# Altium PCB PCB07.PcbDoc
Units mm, origin at the board's own origin, x right, y up, seen from the top; angles counter-clockwise.
Board outline 100 x 100 mm, 2 copper layers (Top Layer, Bottom Layer), stack 1.569 mm thick; 12 components, 2 nets, 12 pads, 112 vias.
Unrouted connection lines stored in the file: 2.
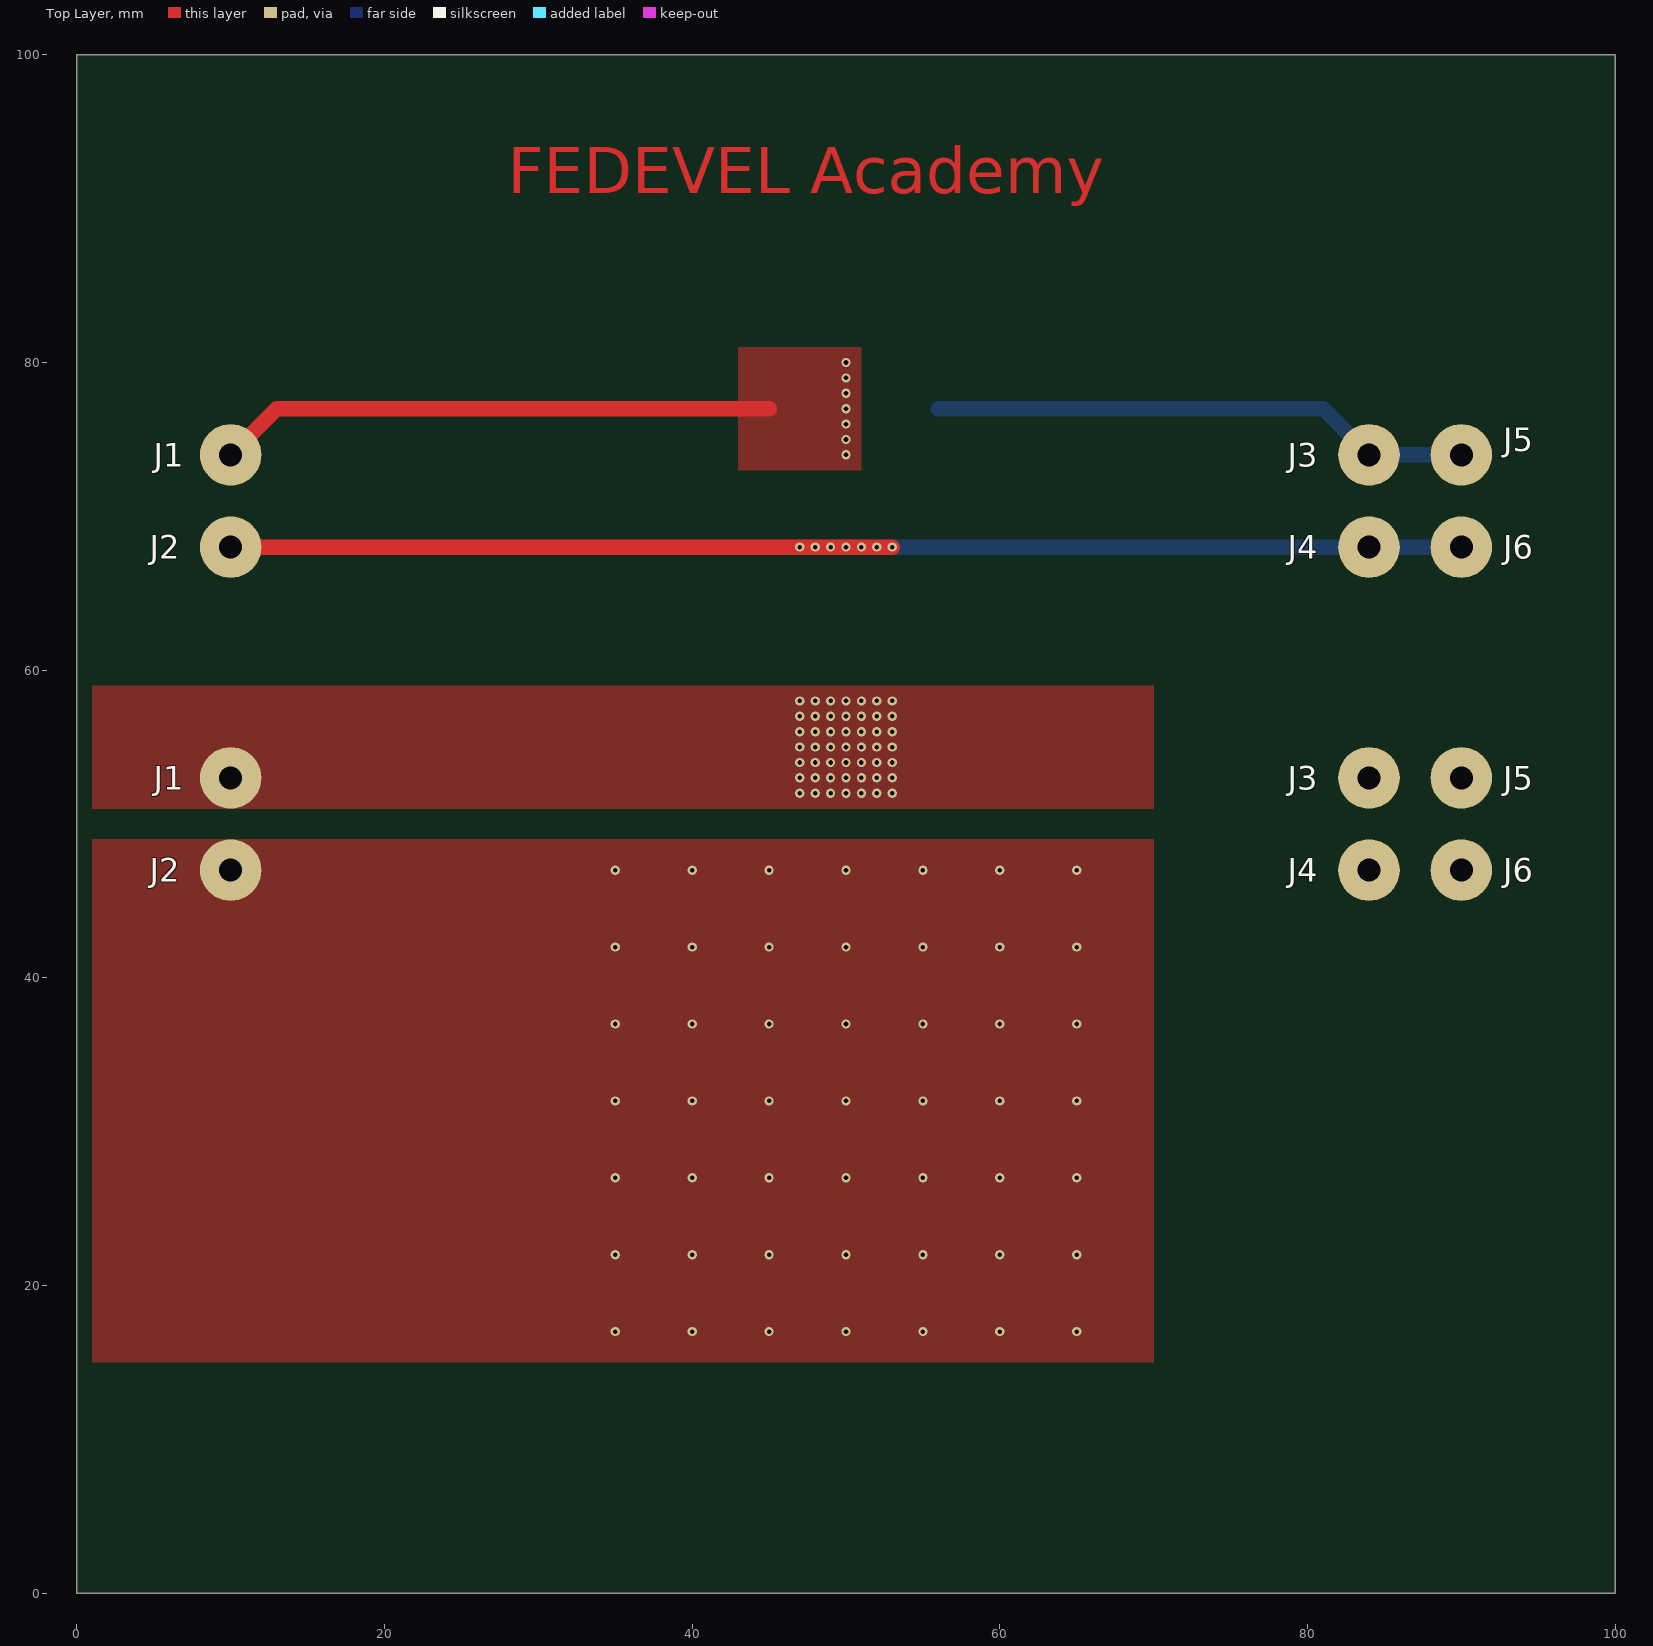
[diagram p0: Top Layer view]
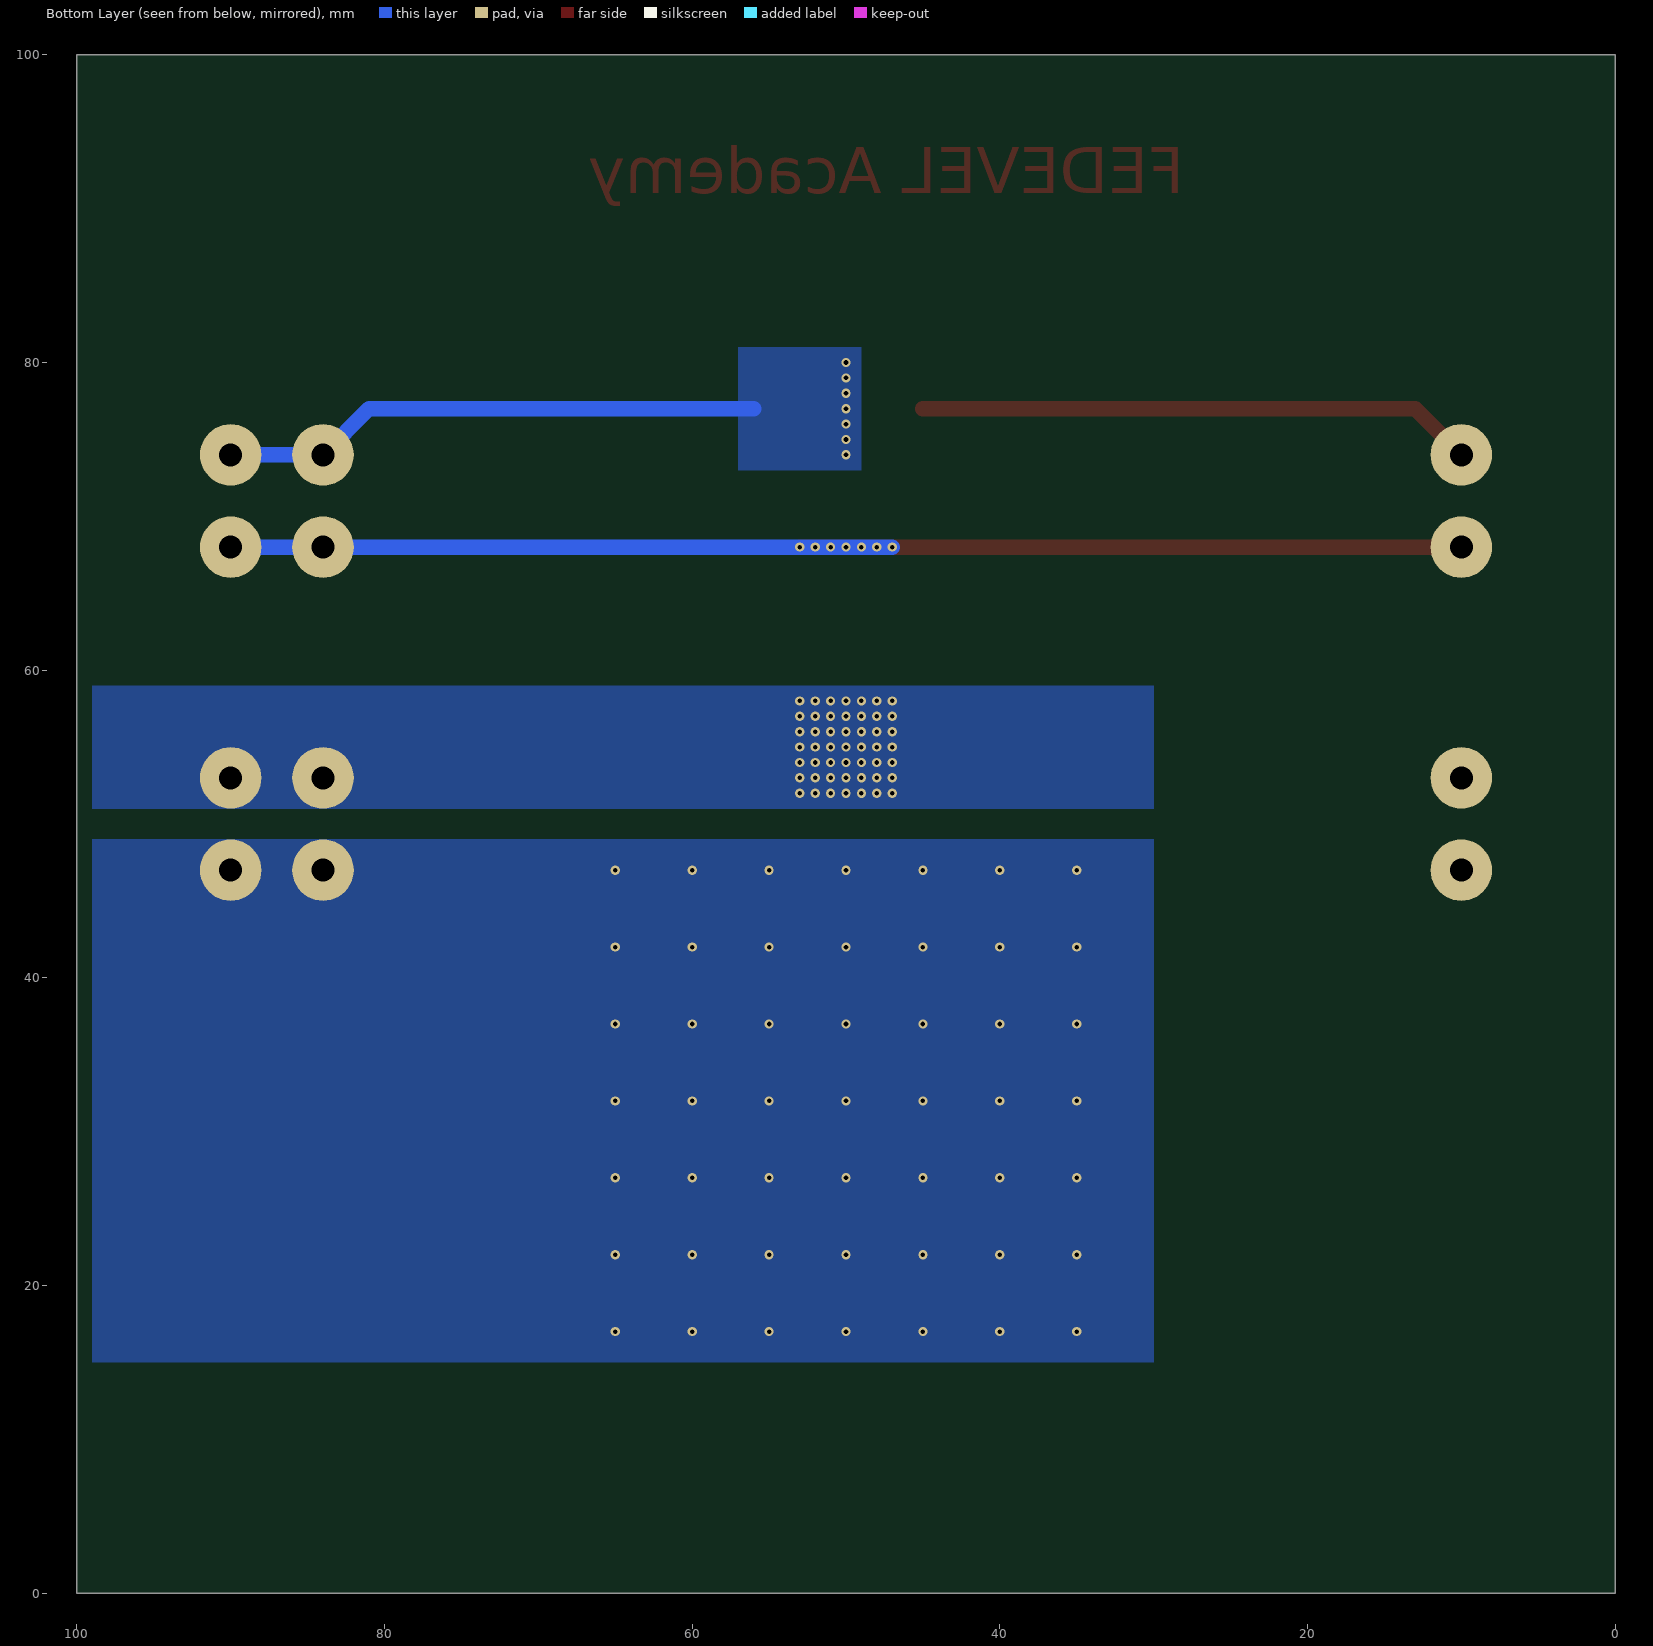
[diagram p1: Bottom Layer view, seen from below]

## Layer stack, top to bottom
Top Solder: solder mask 0.0254, SM-001, Dk 4
Top Layer: signal copper 0.035
Dielectric 1: core 1.4986, Core-043, Dk 4.3
Bottom Layer: signal copper 0.035
Bottom Solder: solder mask 0.0254, SM-001, Dk 4

## Board outline
0,0 100,0 100,100 0,100

## Design rules (kind name [scope] priority, off if disabled: settings)
Clearance [All] p1: gap=0.3 ignorepadtopadclearanceinfootprint=FALSE
PlaneConnect [All] p1: planeconnectstyle=Direct reliefexpansion=0.508 reliefentries=4 reliefconductorwidth=0.254 reliefairgap=0.254
PolygonConnect [All] p1: connectstyle=Direct reliefconductorwidth=0.254 reliefentries=4 polygonreliefangle="90 Angle" airgapwidth=0.254
RoutingVias [All] p1: holewidth=0.3 width=0.6 viastyle="Through Hole" minholewidth=0.3 minwidth=0.6 maxholewidth=0.3 maxwidth=0.6
SolderMaskExpansion [All] p1: expansion=0.102 istentingtop=FALSE
Width [All] p1: maxlimit=1 minlimit=0.15 preferedwidth=0.15
29 further rules are at their usual default settings.

## Components (designator, comment, footprint, x,y, rotation, side; value= is the part's Value field where it differs from the comment)
J1 "4MMx1.5MM" PAD_WITH_HOLE_4MMx1MM5 10,74 r0 top
J1 "4MMx1.5MM" PAD_WITH_HOLE_4MMx1MM5 10,53 r0 top
J2 "4MMx1.5MM" PAD_WITH_HOLE_4MMx1MM5 10,68 r0 top
J2 "4MMx1.5MM" PAD_WITH_HOLE_4MMx1MM5 10,47 r0 top
J3 "4MMx1.5MM" PAD_WITH_HOLE_4MMx1MM5 84,74 r0 top
J3 "4MMx1.5MM" PAD_WITH_HOLE_4MMx1MM5 84,53 r0 top
J4 "4MMx1.5MM" PAD_WITH_HOLE_4MMx1MM5 84,68 r0 top
J4 "4MMx1.5MM" PAD_WITH_HOLE_4MMx1MM5 84,47 r0 top
J5 "4MMx1.5MM" PAD_WITH_HOLE_4MMx1MM5 90,74 r0 top
J5 "4MMx1.5MM" PAD_WITH_HOLE_4MMx1MM5 90,53 r0 top
J6 "4MMx1.5MM" PAD_WITH_HOLE_4MMx1MM5 90,68 r0 top
J6 "4MMx1.5MM" PAD_WITH_HOLE_4MMx1MM5 90,47 r0 top

## Footprints (in the part's own frame and the unit in brackets; to place one, negate y for a bottom-side part, rotate by r counter-clockwise, add the part's x,y. Pads: shape width x height; smd on the part's side, far side on the other; paste and mask are expansions set on the pad)
PAD_WITH_HOLE_4MMx1MM5 [mm]
  round 4 hole 1.5: 1(0,0)

## Part data
J1 J1 J2 J2 J3 J3 J4 J4 J5 J5 J6 J6: library part PAD_WITH_HOLE_4MMx1MM5, "Pad with a hole 4mm x 1.5mm"

## Via types
v1: diameter 0.6, hole 0.3, Top Layer to Bottom Layer, tented both sides, 112 vias

## Nets (pads, with @x,y where several pads share a name; then routed paths per layer and width w, separated by ;. In a path a pad name is that pad's centre, name@x,y a point inside that pad or via, vN(x,y) a via of type N, cw(c..) or ccw(c..) an arc to the next point about the centre after c; other vN are vias at no path point)
+VCC: J1.1 J3.1 J5.1 | length 71.5
  Top Layer w1: J1.1@10,74 13,77 45,77
  Bottom Layer w1: 56,77 81,77 84,74 J5.1@90,74
  other v1: 47,52 48,52 49,52 50,52 51,52 52,52 53,52 47,53 48,53 49,53 50,53 51,53 52,53 53,53 47,54 48,54 49,54 50,54 51,54 52,54 53,54 47,55 48,55 49,55 50,55 51,55 52,55 53,55 47,56 48,56 49,56 50,56 51,56 52,56 53,56 47,57 48,57 49,57 50,57 51,57 52,57 53,57 47,58 48,58 49,58 50,58 51,58 52,58 53,58 50,74 50,75 50,76 50,77 50,78 50,79 50,80
GND: J2.1 J4.1 J6.1 | length 92
  Top Layer w1: J2.1@10,68 v1(53,68)
  Bottom Layer w1: v1(53,68) v1(52,68) v1(51,68) v1(50,68) v1(49,68) v1(48,68) v1(47,68) 84,68 J6.1@90,68
  other v1: 35,17 40,17 45,17 50,17 55,17 60,17 65,17 35,22 40,22 45,22 50,22 55,22 60,22 65,22 35,27 40,27 45,27 50,27 55,27 60,27 65,27 35,32 40,32 45,32 50,32 55,32 60,32 65,32 35,37 40,37 45,37 50,37 55,37 60,37 65,37 35,42 40,42 45,42 50,42 55,42 60,42 65,42 35,47 40,47 45,47 50,47 55,47 60,47 65,47

## Polygon pours and split planes (outlines as drawn)
+VCC on Top Layer "+VCC_L01_P006" (solid, pour order 6): 51,81 51,73 43,73 43,81
GND on Top Layer "GND_L01_P002" (solid, pour order 2): 70,15 70,49 1,49 1,15
+VCC on Top Layer "+VCC_L01_P000" (solid, pour order 0): 70,59 70,51 1,51 1,59
+VCC on Bottom Layer "+VCC_L02_P007" (solid, pour order 7): 49,81 49,73 57,73 57,81
GND on Bottom Layer "GND_L02_P003" (solid, pour order 3): 30,15 30,49 99,49 99,15
+VCC on Bottom Layer "+VCC_L02_P001" (solid, pour order 1): 30,59 30,51 99,51 99,59

## Other copper
Top Layer:
  text "FEDEVEL Academy" at 28.007,91 h3

## Silkscreen, mask and mechanical layers (free items; w line width, h text height)
Top Solder:
  rectangle: 26,89 74,96
Board:
  the board outline again, w0.6